# Altium PCB RADAREXP3PCB1.PcbDoc
Units mm, origin at the board's own origin, x right, y up, seen from the top; angles counter-clockwise.
Board outline 128.65 x 76.45 mm, 2 copper layers (Top Layer, Bottom Layer); 4 components, 5 nets, 41 pads, 0 vias.
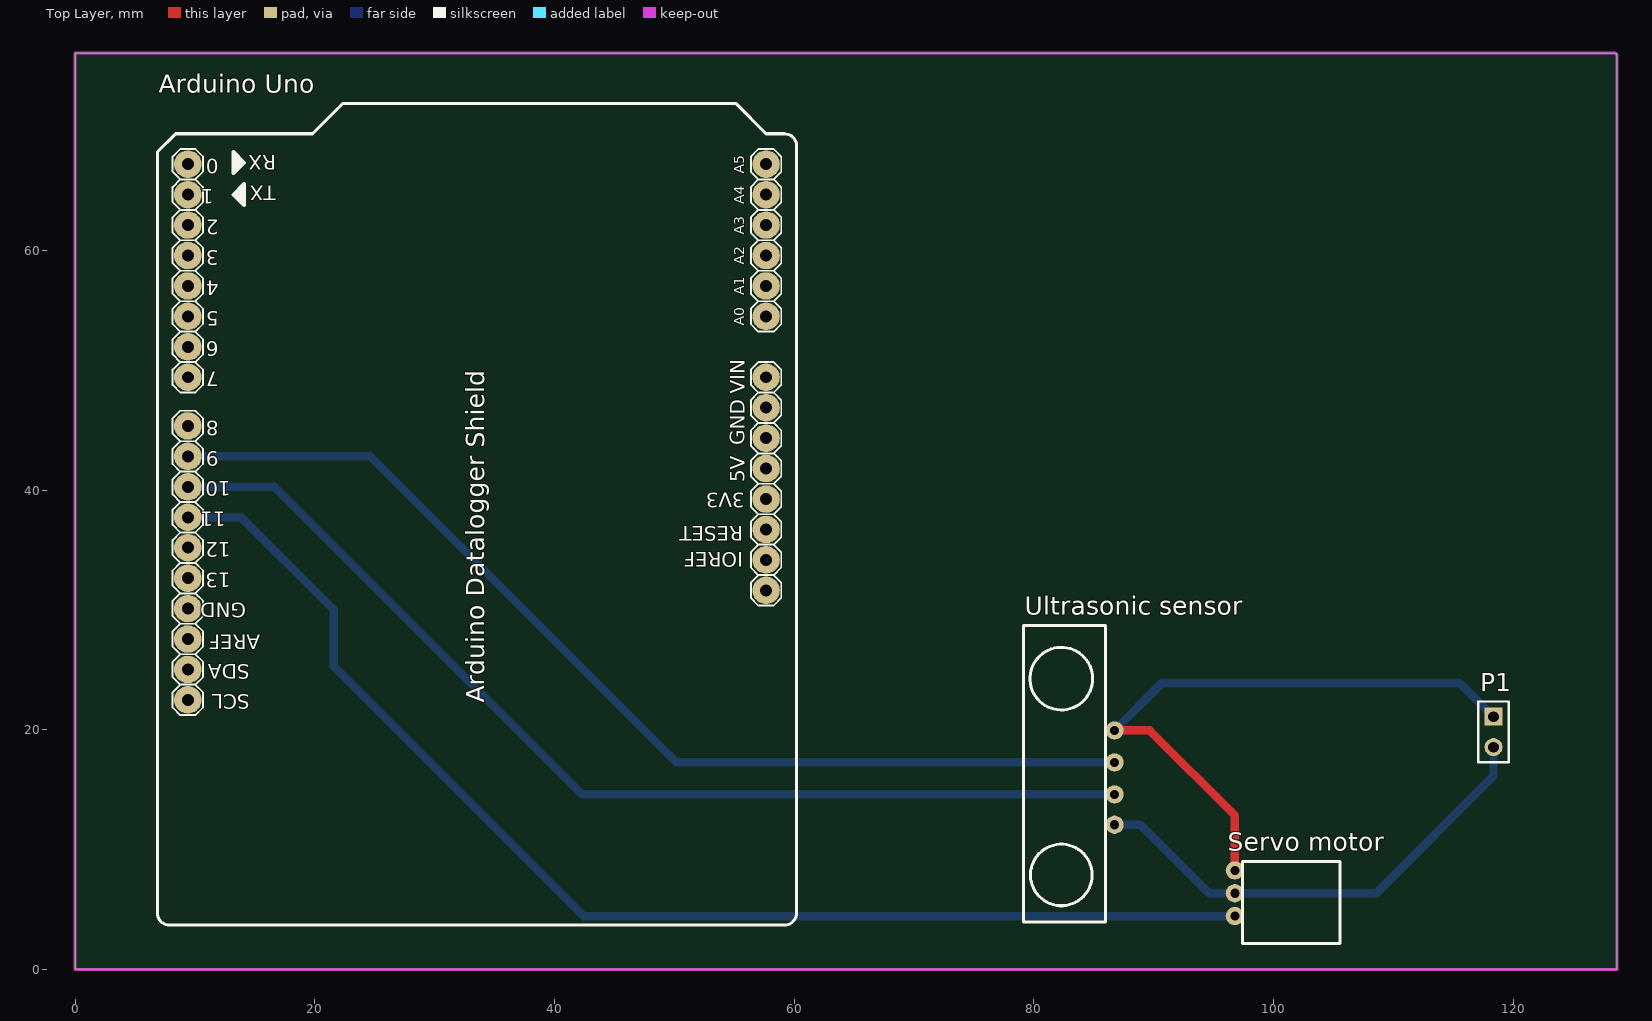
[diagram p0: Top Layer view]
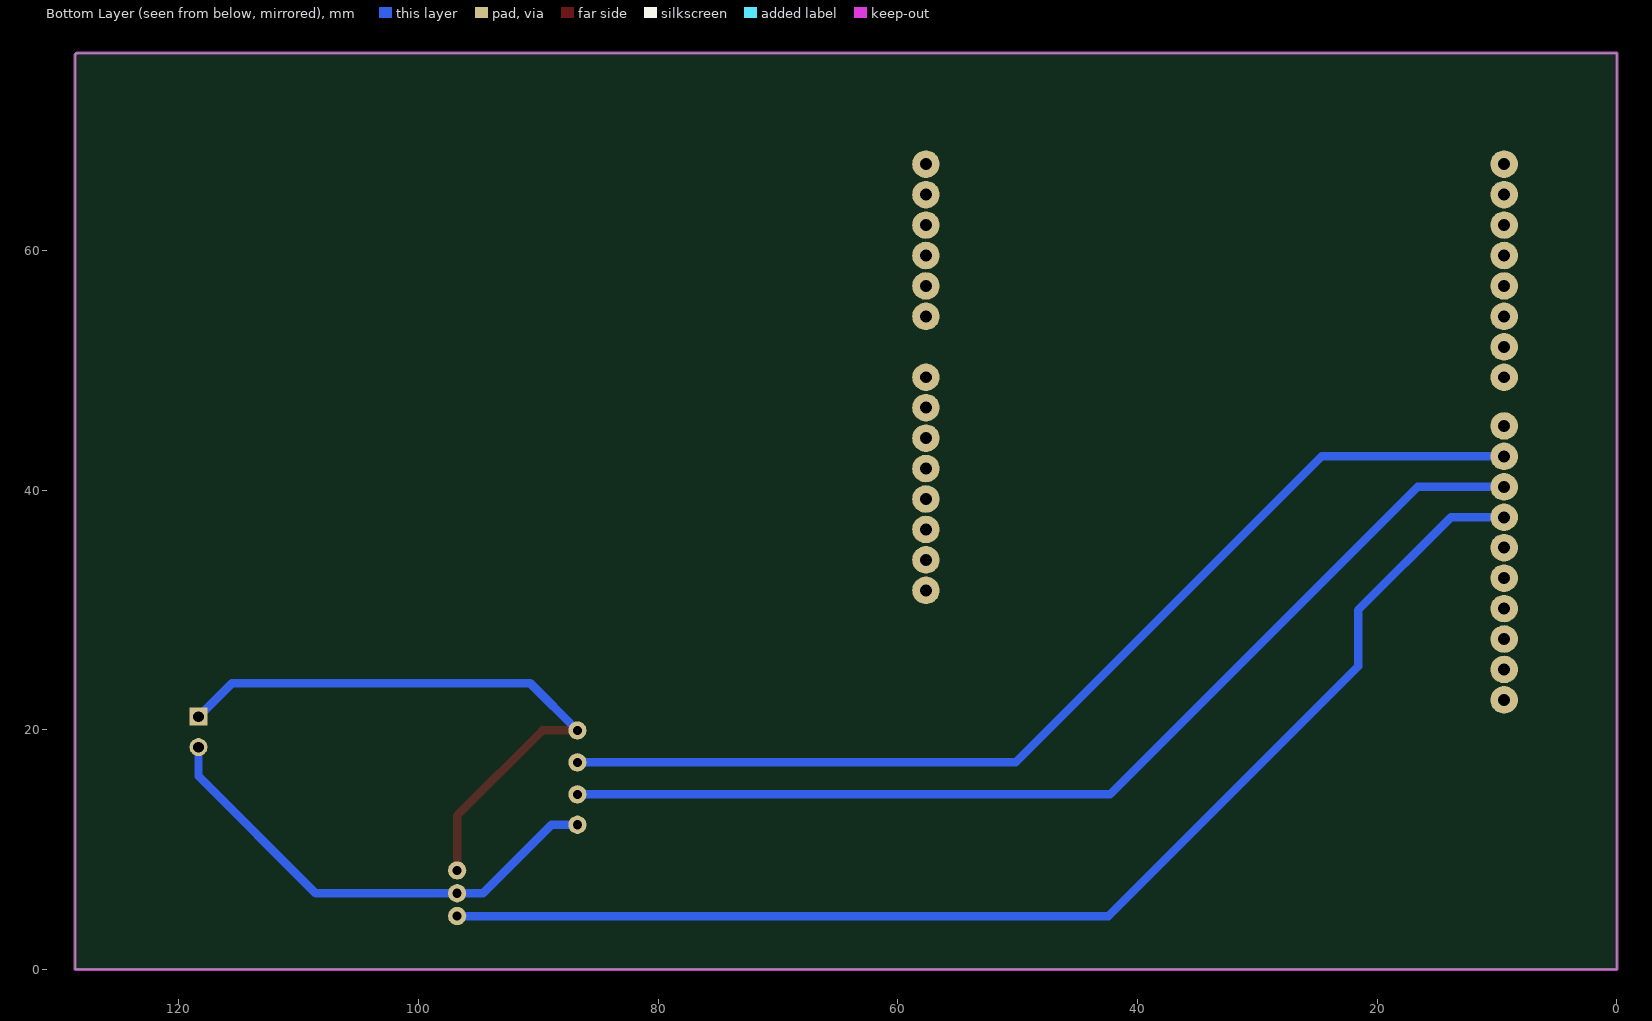
[diagram p1: Bottom Layer view, seen from below]

## Layer stack, top to bottom
Top Solder: solder mask 0.0102, Solder Resist, Dk 3.5
Top Layer: signal copper 0.0356
Dielectric 1: dielectric 0.32, FR-4, Dk 4.8
Bottom Layer: signal copper 0.0356
Bottom Solder: solder mask 0.0102, Solder Resist, Dk 3.5

## Board outline
0,0 128.651,0 128.651,76.454 0,76.454

## Design rules (kind name [scope] priority, off if disabled: settings)
Clearance [All] p1: gap=0.254 ignorepadtopadclearanceinfootprint=FALSE except(0: Arc-Hole Track-Hole SMDPad-Hole THPad-Hole Via-Hole Fill-Hole Poly-Hole Region-Hole Text-Hole)
PolygonConnect [All] p1: connectstyle=Relief reliefconductorwidth=0.254 reliefentries=4 polygonreliefangle="90 Angle" airgapwidth=0.254
RoutingVias [All] p1: holewidth=0.711 width=1.27 viastyle="Through Hole" minholewidth=0.711 minwidth=1.27 maxholewidth=0.711 maxwidth=1.27
SolderMaskExpansion [All] p1: expansion=0.102
Width [All] p1: maxlimit=0.7 minlimit=0.7 preferedwidth=0.7 minimp=50.000000 maximp=50.000000 favimp=50.000000
30 further rules are at their usual default settings.

## Classes and differential pairs
component class "AT long bus (13.3 x 4.2 inches)": P?

## Components (designator, comment, footprint, x,y, rotation, side; value= is the part's Value field where it differs from the comment)
"Arduino Uno" "ARDUINO UNO" "ARDUINO UNO" 33.655,39.751 r90 top
P1 "Header 2" HDR1X2 118.364,21.082 r270 top
"Servo motor" "Component_1" PCBComponent_1#1 105.537,2.159 r180 top
"Ultrasonic sensor" "Component_1" PCBComponent_1#2 79.121,3.937 r90 top

## Footprints (in the part's own frame and the unit in brackets; to place one, negate y for a bottom-side part, rotate by r counter-clockwise, add the part's x,y. Pads: shape width x height; smd on the part's side, far side on the other; paste and mask are expansions set on the pad)
"ARDUINO UNO" [mm]
  round 2.3 hole 1: 0(27.44,24.26) 1(24.9,24.26) 2(22.36,24.26) 3(19.82,24.26) 3.3V(-0.5,-24) 4(17.28,24.26) 5(14.74,24.26) 5V(2.04,-24) 6(12.2,24.26) 7(9.66,24.26) 8(5.596,24.26) 9(3.056,24.26) 10(0.516,24.26) 11(-2.024,24.26) 12(-4.564,24.26) 13(-7.104,24.26) A0(14.74,-24) A1(17.28,-24) A2(19.82,-24) A3(22.36,-24) A4(24.9,-24) A5(27.44,-24) AREF(-12.184,24.26) GND1(7.12,-24) GND2(4.58,-24) GND3(-9.644,24.26) IOREF(-5.58,-24) NC(-8.12,-24) RST(-3.04,-24) SCL(-17.264,24.26) SDA(-14.724,24.26) Vin(9.66,-24)
  silkscreen extent -36.06,-26.54 32.52,26.8
HDR1X2 [mm] "Connector; Header; 2 Position"
  rect 1.5x1.5 hole 0.9: 1(0,0)
  round 1.5 hole 0.9: 2(2.54,0)
  silkscreen extent -1.27,-1.27 3.81,1.27
PCBComponent_1#1 [mil]
  round 60 hole 30: 1(345,-90) 2(345,-165) 3(345,-240)
  silkscreen extent 0,-270 320,0
PCBComponent_1#2 [mil]
  round 60 hole 30: 1(320,-300) 2(420,-300) 3(525,-300) 4(630,-300)
  silkscreen extent 0,-270 975,0

## Part data
P1: "Header, 2-Pin", LatestRevisionDate=17-Jul-2002, LatestRevisionNote="Re-released for DXP Platform.", Publisher="Altium Limited"

## Nets (pads, with @x,y where several pads share a name; then routed paths per layer and width w, separated by ;. In a path a pad name is that pad's centre, name@x,y a point inside that pad or via, vN(x,y) a via of type N, cw(c..) or ccw(c..) an arc to the next point about the centre after c; other vN are vias at no path point)
+5V: "Servo motor.2" "Ultrasonic sensor.1" P1.2 | length 40.5
  Bottom Layer w0.7: 86.741,12.065 88.9,12.065 94.615,6.35 96.774,6.35 108.585,6.35 118.364,16.129 P1.2
GND: "Servo motor.3" "Ultrasonic sensor.4" P1.1 | length 52
  Top Layer w0.7: 86.741,19.939 89.662,19.939 96.774,12.827 96.774,8.255
  Bottom Layer w0.7: 86.741,19.939 90.678,23.876 115.57,23.876 P1.1
"NetArduino Uno_9": "Arduino Uno.9" "Ultrasonic sensor.3" | length 87.9
  Bottom Layer w0.7: 9.395,42.807 24.63,42.807 50.165,17.272 86.741,17.272
"NetArduino Uno_10": "Arduino Uno.10" "Ultrasonic sensor.2" | length 88
  Bottom Layer w0.7: 9.395,40.267 16.629,40.267 42.291,14.605 86.741,14.605
"NetArduino Uno_11": "Arduino Uno.11" "Servo motor.1" | length 103.9
  Bottom Layer w0.7: 9.395,37.727 13.835,37.727 21.59,29.972 21.59,25.273 42.418,4.445 96.774,4.445
pads on no net: "Arduino Uno.0" "Arduino Uno.1" "Arduino Uno.2" "Arduino Uno.3" "Arduino Uno.3.3V" "Arduino Uno.4" "Arduino Uno.5" "Arduino Uno.5V" "Arduino Uno.6" "Arduino Uno.7" "Arduino Uno.8" "Arduino Uno.12" "Arduino Uno.13" "Arduino Uno.A0" "Arduino Uno.A1" "Arduino Uno.A2" "Arduino Uno.A3" "Arduino Uno.A4" "Arduino Uno.A5" "Arduino Uno.AREF" "Arduino Uno.GND1" "Arduino Uno.GND2" "Arduino Uno.GND3" "Arduino Uno.IOREF" "Arduino Uno.NC" "Arduino Uno.RST" "Arduino Uno.SCL" "Arduino Uno.SDA" "Arduino Uno.Vin"

## Keep-outs
Keep-Out Layer:
  lines w0.254: 0,0 0,76.454 128.524,76.454 128.651,76.327 128.651,0 0,0

## Text inside footprints (layer, text, board x,y; h text height)
"Arduino Uno": Top Overlay "5V" at 55.877,40.648 h1.21 r90; Top Overlay "A0" at 55.852,53.704 h0.86 r90; Top Overlay "AREF" at 15.452,27.937 h1.21 r180; Top Overlay "GND" at 14.269,30.579 h1.21 r180; Top Overlay "RESET" at 55.75,36.965 h1.21 r180; Top Overlay "3V3" at 55.877,39.759 h1.21 r180; Top Overlay "A1" at 55.852,56.244 h0.86 r90; Top Overlay "A2" at 55.852,58.784 h0.86 r90; Top Overlay "A3" at 55.852,61.324 h0.86 r90; Top Overlay "A4" at 55.852,63.864 h0.86 r90; Top Overlay "A5" at 55.852,66.404 h0.86 r90; Top Overlay "VIN" at 55.877,48.014 h1.21 r90; Top Overlay "GND" at 55.877,43.721 h1.21 r90; Top Overlay "IOREF" at 55.75,34.806 h1.21 r180; Top Overlay "TX" at 16.736,65.413 h1.21 r180; Top Overlay "RX" at 16.761,67.953 h1.21 r180; Top Overlay "13" at 12.986,33.094 h1.21 r180; Top Overlay "12" at 12.986,35.634 h1.21 r180; Top Overlay "11" at 12.583,38.174 h1.21 r180; Top Overlay "10" at 12.986,40.714 h1.21 r180; Top Overlay "9" at 11.979,43.254 h1.21 r180; Top Overlay "8" at 11.979,45.794 h1.21 r180; Top Overlay "7" at 11.979,49.858 h1.21 r180; Top Overlay "6" at 11.979,52.398 h1.21 r180; Top Overlay "5" at 11.979,54.938 h1.21 r180; Top Overlay "4" at 11.979,57.478 h1.21 r180; Top Overlay "3" at 11.979,60.018 h1.21 r180; Top Overlay "2" at 11.979,62.558 h1.21 r180; Top Overlay "1" at 11.576,65.098 h1.21 r180; Top Overlay "0" at 11.979,67.638 h1.21 r180; Top Overlay "SCL" at 14.555,22.951 h1.21 r180; Top Overlay "SDA" at 14.568,25.48 h1.21 r180; Top Overlay "Arduino Datalogger Shield" at 34.155,22.251 h1.52 r90